# Altium PCB VehicleTracking.PcbDoc
Units mm, origin at the board's own origin, x right, y up, seen from the top; angles counter-clockwise.
Board outline 124.05 x 67.25 mm, 2 copper layers (Top Layer, Bottom Layer); 41 components, 30 nets, 221 pads, 25 vias.
Unrouted connection lines stored in the file: 3.
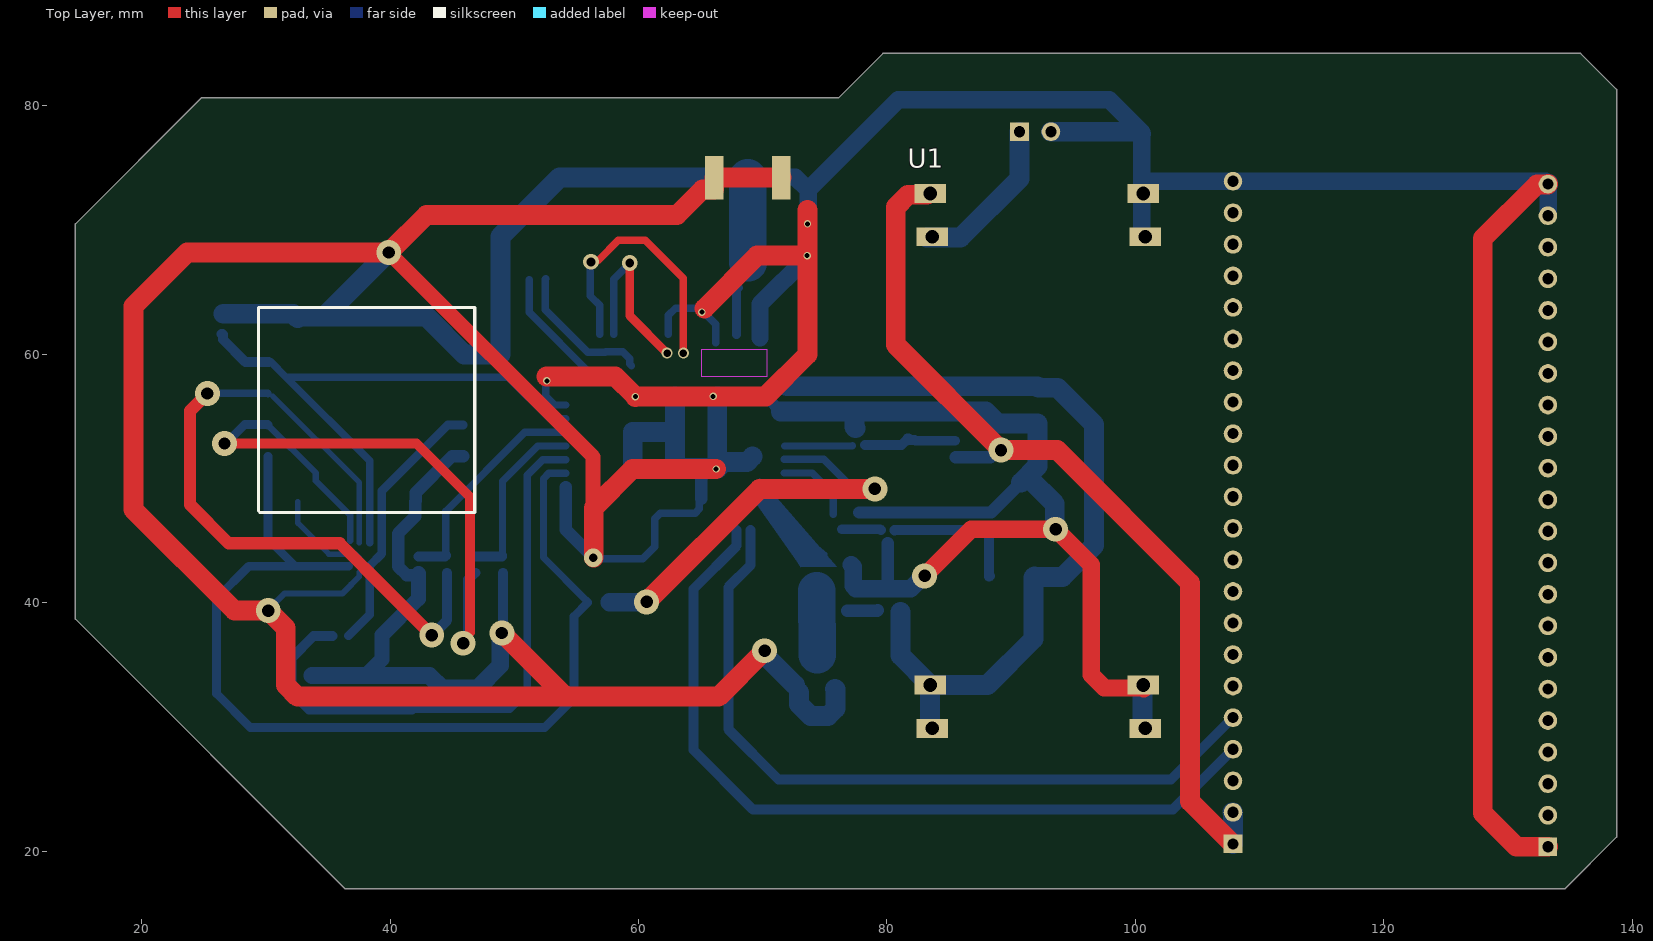
[diagram p0: Top Layer view]
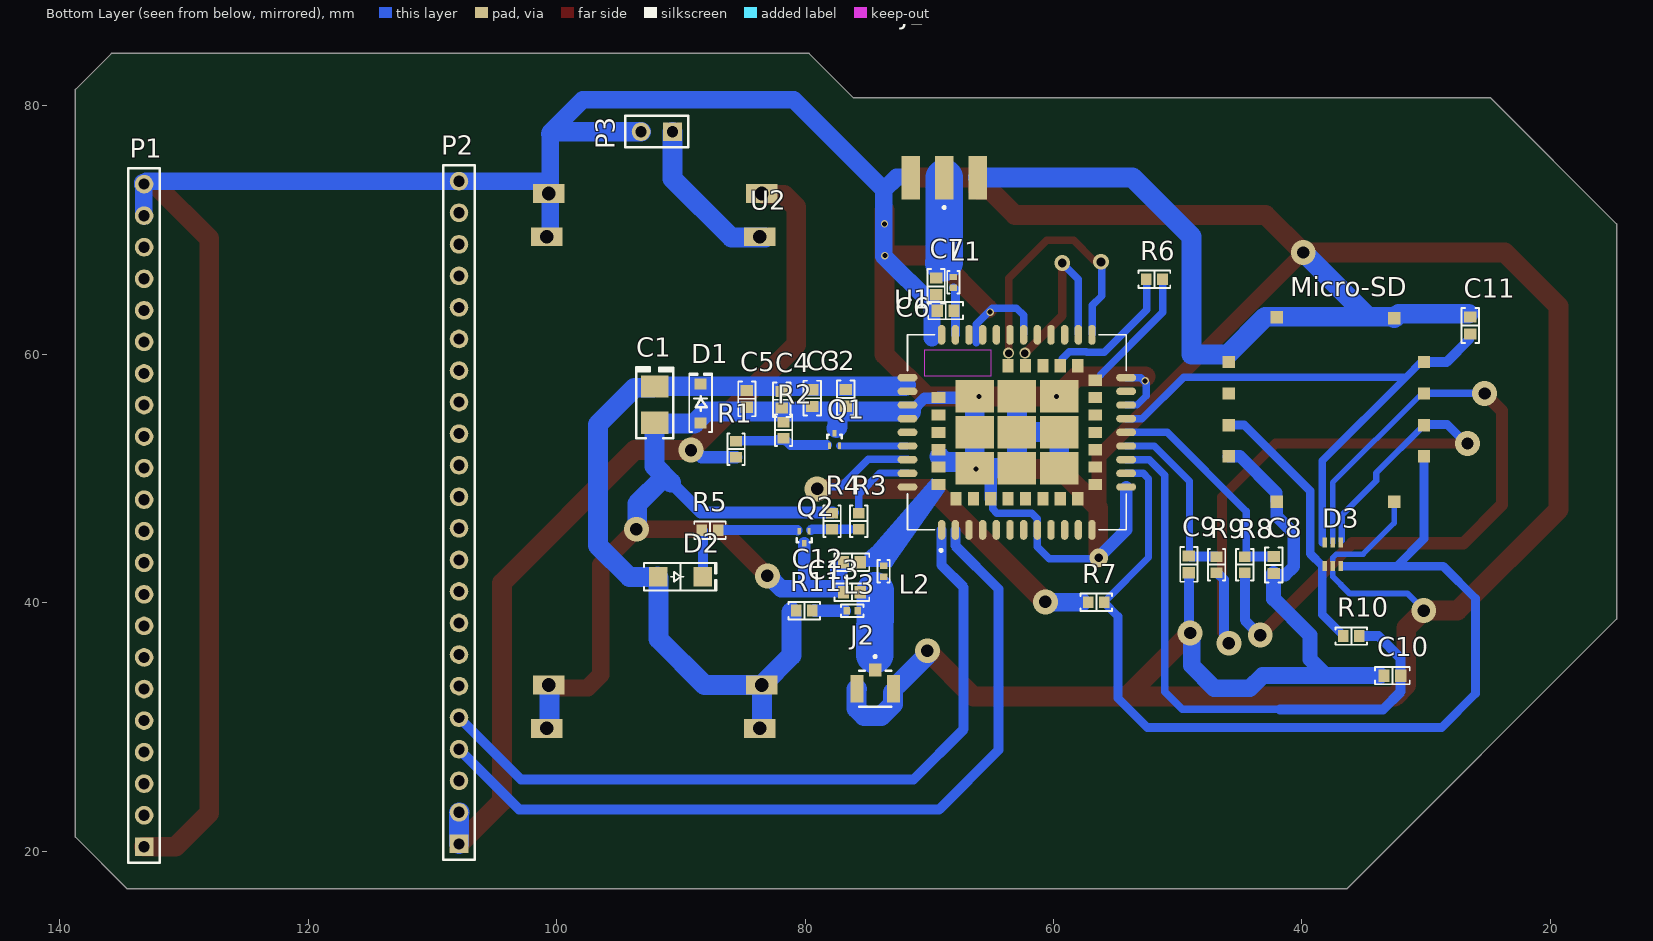
[diagram p1: Bottom Layer view, seen from below]
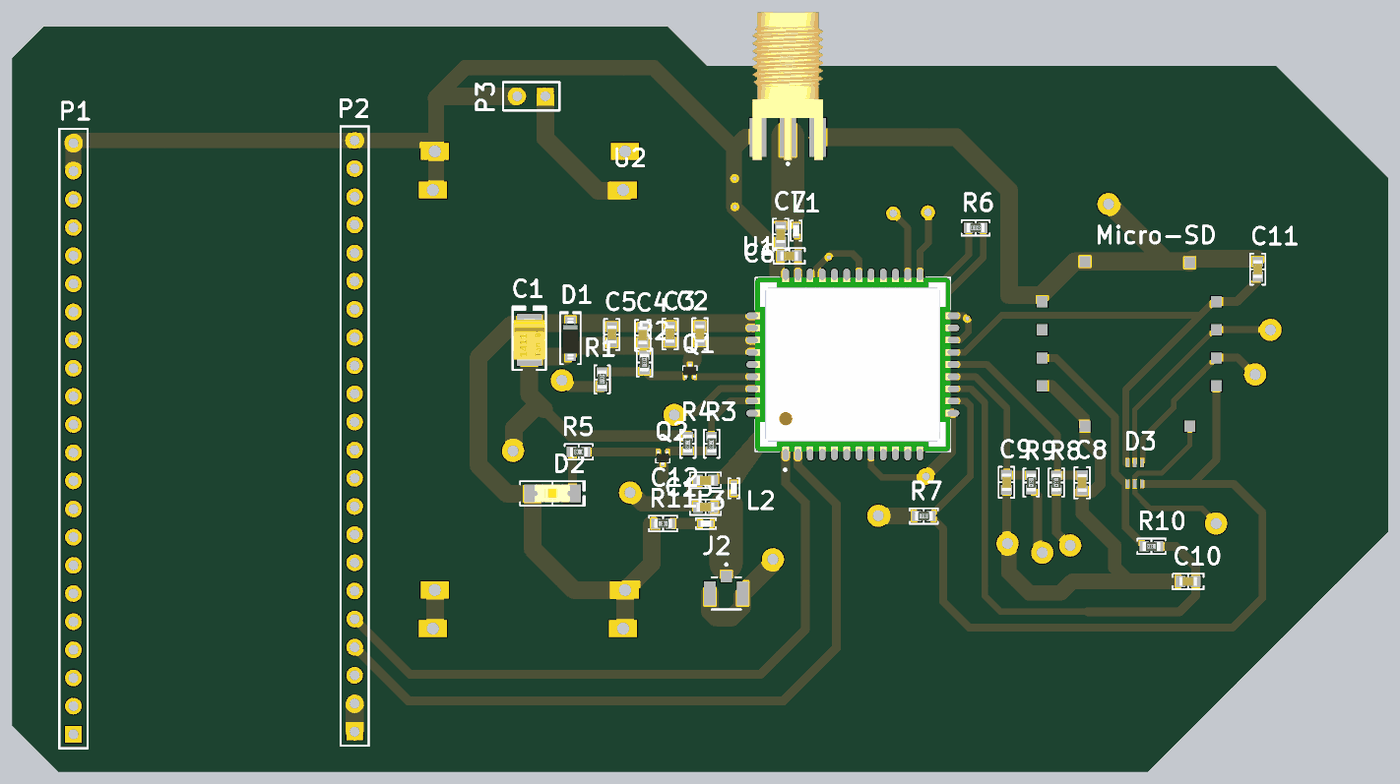
[diagram p2: 3D render of the assembled board from below, using the file's embedded part models]

## Layer stack, top to bottom
Top Solder: solder mask 0.0102, Solder Resist, Dk 3.5
Top Layer: signal copper 0.0356
Dielectric 1: dielectric 0.32, FR-4, Dk 4.8
Bottom Layer: signal copper 0.0356
Bottom Solder: solder mask 0.0102, Solder Resist, Dk 3.5

## Board outline
36.4,16.975 14.675,38.7 14.675,70.5 24.85,80.675 76.125,80.675 79.675,84.225 135.825,84.225 138.725,81.325 138.725,21.15 134.55,16.975

## Design rules (kind name [scope] priority, off if disabled: settings)
Clearance [All] p1: gap=0.254 ignorepadtopadclearanceinfootprint=FALSE except(0: Arc-Hole Track-Hole SMDPad-Hole THPad-Hole Via-Hole Fill-Hole Poly-Hole Region-Hole Text-Hole)
PolygonConnect [All] p1: connectstyle=Relief reliefconductorwidth=0.254 reliefentries=4 polygonreliefangle="90 Angle" airgapwidth=0.254
RoutingVias [All] p1: holewidth=0.711 width=2 viastyle="Through Hole" minholewidth=0.711 minwidth=0.5 maxholewidth=0.711 maxwidth=3
SolderMaskExpansion [All] p1: expansion=0.102 istentingtop=FALSE
Width [All] p1: maxlimit=3 minlimit=0.254 preferedwidth=0.6 minimp=50.000000 maximp=50.000000 favimp=50.000000
30 further rules are at their usual default settings.

## Components (designator, comment, footprint, x,y, rotation, side; value= is the part's Value field where it differs from the comment)
C1 "100µF" "CAP POL 1411_3528" 92.1,55.95 r270 bottom
C2 "100nF" "CAP 0603_1608" 76.725,56.5 r90 bottom
C3 "33pF" "CAP 0603_1608" 79.425,56.475 r90 bottom
C4 "10uF" "CAP 0603_1608" 81.875,56.35 r90 bottom
C5 "10pF" "CAP 0603_1608" 84.675,56.425 r90 bottom
C6 "C101" "CAP 0603_1608" 68.675,63.525 r180 bottom
C7 "C102" "CAP 0603_1608" 69.45,65.475 r90 bottom
C8 "22 pF" "CAP 0603_1608" 42.275,43.05 r90 bottom
C9 "22 pF" "CAP 0603_1608" 49.1,43.1 r90 bottom
C10 "22 pF" "CAP 0603_1608" 32.725,34.15 r180 bottom
C11 "100 nF" "CAP 0603_1608" 26.45,62.325 r270 bottom
C12 "C101" "CAP 0603_1608" 76.225,43.275 r180 bottom
C13 "C102" "CAP 0603_1608" 76.225,40.85 r180 bottom
D1 "MMSZ5231BT1G" SOD-123 88.4,56.05 r90 bottom
D2 "Yellow" "LED 1206_3216 YELLOW" 90.025,42.1 r180 bottom
D3 "SMF05C.TCT" SC70-6 37.525,43.9 r180 bottom
J1 "CON-SMA-EDGE-S" RFSOLUTIONS_CON-SMA-EDGE-S 68.8,74.225 r270 bottom
J2 "RSP-122811-01" SAMTEC_RSP-122811-01 74.35,33.075 r0 bottom
L1 "L101" "IND 0402_1005" 68.05,65.8 r90 bottom value="5.6 nH"
L2 "L101" "IND 0402_1005" 73.675,42.55 r270 bottom value="5.6 nH"
L3 "27 nH" "IND 0402_1005" 76.2,39.375 r180 bottom value="5.6 nH"
Micro-SD "SIM HOLDER" 115R-BCA0 30.175,48.155 r90 bottom
P1 "Header 22" HDR1X22 133.2,20.365 r90 bottom
P2 "Header 22" HDR1X22 107.85,20.6 r90 bottom
P3 "Header 2" HDR1X2 90.66,77.925 r0 bottom
Q1 "BC847BM3T5G" "ON SEMI SOT-723" 77.625,53.15 r90 bottom
Q2 "BC847BM3T5G" "ON SEMI SOT-723" 80.075,45.29 r270 bottom
R1 "4.7 kOhms" "RES 0603_1608" 85.55,52.375 r90 bottom
R2 "47 kOhms" "RES 0603_1608" 81.725,53.9 r90 bottom
R3 "4.7 kOhms" "RES 0603_1608" 75.675,46.575 r270 bottom
R4 "47 kOhms" "RES 0603_1608" 77.825,46.575 r270 bottom
R5 "1 kOhms" "RES 0603_1608" 87.65,45.85 r0 bottom
R6 "10 kOhms" "RES 0603_1608" 51.875,66.05 r180 bottom
R7 "4.7 kOhms" "RES 0603_1608" 56.55,40.05 r180 bottom
R8 "22 Ohms" "RES 0603_1608" 44.6,43.075 r270 bottom
R9 "22 Ohms" "RES 0603_1608" 46.875,43.075 r270 bottom
R10 "22 Ohms" "RES 0603_1608" 36.025,37.325 r0 bottom
R11 "10 Ohms" "RES 0603_1608" 80.05,39.375 r180 bottom
U1 "LM2596" LM2596 102.525,74.15 r180 top
U1 "SIM868" XCVR_SIM868 62.95,53.725 r90 bottom
U2 "LM2596" LM2596 102.7,28.7 r180 bottom

## Footprints (in the part's own frame and the unit in brackets; to place one, negate y for a bottom-side part, rotate by r counter-clockwise, add the part's x,y. Pads: shape width x height; smd on the part's side, far side on the other; paste and mask are expansions set on the pad)
115R-BCA0 [mm] "Micro SD"
  rect 1x1 smd: C0(0,2.4) C0(0,11.85) C0(14.75,2.4) C0(14.85,11.85) C1(11.235,0) C2(8.695,0) C3(6.155,0) C4(3.65,0) C5(11.235,15.7) C6(8.695,15.7) C7(6.155,15.7) C8(3.65,15.7)
"CAP 0603_1608" [mm] "Chip Capacitor, 2-Leads, Body 1.60x0.80mm, IPC Medium Density"
  rect 0.9x1 smd: 1(-0.675,0) 2(0.675,0)
  silkscreen extent -1.4,-0.7 1.4,0.7, body extent -0.8,-0.41 0.8,0.41, height 0.82
"CAP POL 1411_3528" [mm] "Molded Capacitor, 2-Leads, Body 3.50x2.80mm, IPC Medium Density"
  rect 1.8x2.23 smd: 1(-1.46,0) 2(1.46,0)
  silkscreen extent -3,-1.5 2.71,1.48, body extent -1.87,-1.45 1.87,1.45, height 2
HDR1X2 [mm] "Connector; Header; 2 Position"
  rect 1.5x1.5 hole 0.9: 1(0,0)
  round 1.5 hole 0.9: 2(2.54,0)
  silkscreen extent -1.27,-1.27 3.81,1.27
HDR1X22 [mm] "Connector; Header; 22 Position"
  rect 1.5x1.5 hole 0.9: 1(0,0)
  round 1.5 hole 0.9: 2(2.54,0) 3(5.08,0) 4(7.62,0) 5(10.16,0) 6(12.7,0) 7(15.24,0) 8(17.78,0) 9(20.32,0) 10(22.86,0) 11(25.4,0) 12(27.94,0) 13(30.48,0) 14(33.02,0) 15(35.56,0) 16(38.1,0) 17(40.64,0) 18(43.18,0) 19(45.72,0) 20(48.26,0) 21(50.8,0) 22(53.34,0)
  silkscreen extent -1.27,-1.27 54.61,1.27
"IND 0402_1005" [mm] "Inductor, 2-Leads, Body 1.02x0.51mm, IPC Medium Density"
  rect 0.5x0.6 smd: 1(-0.44,0) 2(0.44,0)
  silkscreen extent -0.9,-0.5 0.9,0.5, body extent -0.5,-0.3 0.5,0.3, height 0.6
"LED 1206_3216 YELLOW" [mm] "Chip Diode, 2-Leads, Body 3.13x1.55mm, IPC Medium Density"
  rect 1.5x1.6 smd: 1(-1.8,0) 2(1.8,0)
  silkscreen extent -2.92,-1.1 2.92,1.1, body extent -1.6,-0.8 1.6,0.8, height 0.9
LM2596 [mm]
  rect 2.54x1.524 hole 1.1: 0(19.05,40.767) 1(1.9,40.767) 2(19.05,1.2) 3(1.9,1.2)
"ON SEMI SOT-723" [mm] "SOT-723, 3-Leads, Body 0.8x1.20mm, Pitch 0.40mm, IPC Medium Density"
  rect 0.52x0.27 smd: 1(-0.49,0.4) 3(-0.49,-0.4)
  rect 0.52x0.36 smd: 2(0.49,0)
  silkscreen extent 0.1,-0.6 0.4,0.6, body extent -0.6,-0.6 0.6,0.6, height 0.55
"RES 0603_1608" [mm] "Chip Resistor, 2-Leads, Body 1.60x0.80mm, IPC Medium Density"
  rect 0.85x0.95 smd: 1(-0.65,0) 2(0.65,0)
  silkscreen extent -1.27,-0.7 1.27,0.7, body extent -0.8,-0.4 0.8,0.4, height 0.45
RFSOLUTIONS_CON-SMA-EDGE-S [mm]
  rect 3.5x1.5 smd: 1(0,0) G1(0,2.7) G2(0,-2.7)
  rect 3.5x1.5 smd far side: G3(0,2.7) G4(0,-2.7)
  silkscreen extent 2.3,-0.1 2.5,0.1, body extent -11.27,-3.18 2.06,3.18, height 3.55
SAMTEC_RSP-122811-01 [mm]
  rect 1x1.05 smd: 1(0,-1.525)
  rect 1.05x2.2 smd: G1(-1.475,0) G2(1.475,0)
  silkscreen extent -1.3,-2.7 1.3,1.45
SC70-6 [mm]
  rect 0.35x0.8 smd paste-1 mask+0: 1(-0.65,-0.95) 2(0,-0.95) 3(0.65,-0.95) 4(0.65,0.95) 5(0,0.95) 6(-0.65,0.95)
SOD-123 [mm] "SOD, 2-Leads, Body 1.55x3.70mm, IPC Medium Density"
  rect 0.9x0.95 smd: 1(-1.575,0) 2(1.575,0)
  silkscreen extent -2.3,-0.92 2.41,0.92, body extent -1.86,-0.78 1.86,0.77, height 1.35
XCVR_SIM868 [mm]
  oval 1.6x0.6 smd: 1(-7.85,6.05) 2(-7.85,4.95) 3(-7.85,3.85) 4(-7.85,2.75) 5(-7.85,1.65) 6(-7.85,0.55) 7(-7.85,-0.55) 8(-7.85,-1.65) 9(-7.85,-2.75) 10(-7.85,-3.85) 11(-7.85,-4.95) 12(-7.85,-6.05) 22(7.85,-6.05) 23(7.85,-4.95) 24(7.85,-3.85) 25(7.85,-2.75) 26(7.85,-1.65) 27(7.85,-0.55) 28(7.85,0.55) 29(7.85,1.65) 30(7.85,2.75) 31(7.85,3.85) 32(7.85,4.95) 33(7.85,6.05)
  oval 0.6x1.6 smd: 13(-4.4,-8.8) 14(-3.3,-8.8) 15(-2.2,-8.8) 16(-1.1,-8.8) 17(0,-8.8) 18(1.1,-8.8) 19(2.2,-8.8) 20(3.3,-8.8) 21(4.4,-8.8) 34(4.4,8.8) 35(3.3,8.8) 36(2.2,8.8) 37(1.1,8.8) 38(0,8.8) 39(-1.1,8.8) 40(-2.2,8.8) 41(-3.3,8.8) 42(-4.4,8.8)
  rect 1.1x0.9 smd paste-2: 43(-5.35,4.9) 44(-5.35,3.5) 45(-5.35,2.1) 46(-5.35,0.7) 47(-5.35,-0.7) 48(-5.35,-2.1) 49(-5.35,-3.5) 50(-5.35,-4.9) 58(5.35,-4.9) 59(5.35,-3.5) 60(5.35,-2.1) 61(5.35,-0.7) 62(5.35,0.7)
  rect 0.9x1.1 smd paste-2: 51(-4.2,-6.3) 52(-2.8,-6.3) 53(-1.4,-6.3) 54(0,-6.3) 55(1.4,-6.3) 56(2.8,-6.3) 57(4.2,-6.3) 63(2.8,6.3) 64(1.4,6.3) 65(0,6.3) 66(-1.4,6.3) 67(-2.8,6.3) 68(-4.2,6.3)
  rect 2.6x3.1 smd paste-3: 69(-2.9,3.4) 70(-2.9,0) 71(-2.9,-3.4) 72(0,-3.4) 73(2.9,-3.4) 74(2.9,0) 75(2.9,3.4) 76(0,3.4) 77(0,0)
  Keep-Out Layer region: 6.65,2.102 4.504,2.102 4.504,7.4 6.65,7.4
  Keep-Out Layer region: 6.65,2.101 4.502,2.101 4.502,7.4 6.65,7.4
  silkscreen extent -9.6,-8.8 7.85,8.8, body extent -7.85,-8.8 7.85,8.8, height 2.6

## Part data
C1: library part F930J107MBA, "CAP TANT 100UF 20% 6.3V 1411", Device Package="1411 (3528 Metric)", ESR (Equivalent Series Resistance)="900mOhm @ 100kHz", Lifetime @ Temp.="2000 Hrs @ 125°C", Manufacturer="AVX Corporation", Manufacturer Size Code=B, Operating Temperature="-55°C ~ 125°C", Supplier Part Number 1=478-8156-1-ND, Tolerance=±20%, Voltage - Rated=6.3V, Capacitance=100µF, ComponentLink1Description=Datasheet, ComponentLink1URL=http://datasheets.avx.com/F93.pdf, ComponentLink2Description="DigiKey Link", ComponentLink2URL=http://digikey.com/product-detail/en/avx-corporation/F930J107MBA/478-8156-1-ND/4005661, Features="General Purpose", Height - Seated (Max)="0.091\" (2.30mm)", lastupdated="2.09.2020 01:15:45", Lifecycle Status=Active, Minimum Order=1, Mounting Type="Surface Mount", Package / Case="1411 (3528 Metric)", packaging=TapeAndReel, Part Number=F930J107MBA, Part Status=Active, partid=257, price=0.14, series=F93, Size / Dimension="0.138\" L x 0.110\" W (3.50mm x 2.80mm)", Supplier 1=DigiKey, Type=Molded
C2 C3 C4 C5: library part 600S2R7AW250XT, "CAP CER 2.7PF 250V NP0 0603", Capacitance="2.7 pF", Device Package="0603 (1608 Metric)", Manufacturer="American Technical Ceramics", Operating Temperature="-55°C ~ 125°C", Supplier Part Number 1=478-12310-1-ND, Temperature Coefficient="C0G, NP0", Tolerance=±0.05pF, Voltage - Rated=250V, Applications="RF, Microwave, High Frequency, Bypass, Decoupling", ComponentLink1Description=Datasheet, ComponentLink1URL=http://www.atceramics.com/UserFiles/600s.pdf, ComponentLink2Description="DigiKey Link", ComponentLink2URL=https://www.digikey.com/en/products/detail/american-technical-ceramics/600S2R7AW250XT/3909029, Features="High Q, Low Loss, Ultra Low ESR", lastupdated="5.11.2023 20:09:27", Lifecycle Status=Active, Minimum Order=1, Mounting Type="Surface Mount, MLCC", Package / Case="0603 (1608 Metric)", packaging=TapeAndReel, Part Number=600S2R7AW250XT, Part Status=Active, partid=2143, price=0.41, series="ATC 600S", Size / Dimension="0.063\" L x 0.032\" W (1.60mm x 0.81mm)", Supplier 1=DigiKey, Thickness (Max)="0.035\" (0.89mm)"
C6 C7 C8 C9 C10 C11 C12 C13: library part C0603C272F3GAC7867, "CAP CER 2700PF 25V NP0 0603", Capacitance="2700 pF", Device Package="0603 (1608 Metric)", Manufacturer=KEMET, Operating Temperature="-55°C ~ 125°C", Supplier Part Number 1=399-17403-1-ND, Temperature Coefficient="C0G, NP0", Tolerance=±1%, Voltage - Rated=25V, Applications="General Purpose", ComponentLink1Description=Datasheet, ComponentLink1URL=https://api.kemet.com/component-edge/download/datasheet/C0603C272F3GACTU.pdf, ComponentLink2Description="DigiKey Link", ComponentLink2URL=https://www.digikey.com/en/products/detail/kemet/C0603C272F3GAC7867/2200413, Features="Low ESL", lastupdated="5.11.2023 20:09:28", Lifecycle Status=Active, Minimum Order=1, Mounting Type="Surface Mount, MLCC", Package / Case="0603 (1608 Metric)", packaging=TapeAndReel, Part Number=C0603C272F3GAC7867, Part Status=Active, partid=2138, price=0.40, series="SMD Comm C0G", Size / Dimension="0.063\" L x 0.031\" W (1.60mm x 0.80mm)", Supplier 1=DigiKey, Thickness (Max)="0.034\" (0.87mm)"
D1: "DIODE ZENER 5.1V 500MW SOD123", Current - Reverse Leakage @ Vr="5µA @ 2V", Manufacturer="ON Semiconductor", Operating Temperature="-55°C ~ 150°C", Package / Case=SOD-123, Power - Max=500mW, Supplier Part Number 1=MMSZ5231BT1GOSCT-ND, Tolerance=±5%, Voltage - Forward (Vf) (Max) @ If="900mV @ 10mA", Voltage - Zener (Nom) (Vz)=5.1V, ComponentLink1Description=Datasheet, ComponentLink1URL=http://www.onsemi.com/pub/Collateral/MMSZ5221BT1-D.PDF, ComponentLink2Description="DigiKey Link", ComponentLink2URL=http://digikey.com/product-detail/en/on-semiconductor/MMSZ5231BT1G/MMSZ5231BT1GOSCT-ND/964561, lastupdated="5.11.2023 21:26:31", Lifecycle Status=Active, Minimum Order=1, Mounting Type="Surface Mount", packaging=TapeAndReel, Part Number=MMSZ5231BT1G, Part Status=Active, partid=2389, price=0.03, series="Automotive, AEC-Q101", Supplier 1=DigiKey, Supplier Device Package=SOD-123, Impedance (Max) (Zzt)="17 Ohms"
D2: library part 5990240007F, "LED YELLOW 1206 SMD", Current - Test=20mA, Device Package="1206 (3216 Metric)", Lens Color=0.80mm, Manufacturer=Dialight, Millicandela Rating=126mcd, Supplier Device Package=1206, Supplier Part Number 1=350-4363-1-ND, Voltage - Forward (Vf) (Typ)=2.1V, Color=Yellow, ComponentLink1Description=Datasheet, ComponentLink1URL=http://www.dialightsignalsandcomponents.com/Assets/Brochures_And_Catalogs/Indication/CBI_SMD_new/Dialight_CBI_data_599-1206_Apr2018.pdf, ComponentLink2Description="DigiKey Link", ComponentLink2URL=https://www.digikey.com/en/products/detail/dialight/5990240007F/9385418, Configuration=Standard, Height (Max)=0.80mm, lastupdated="5.11.2023 21:32:29", Lens Size="2.00mm x 1.60mm", Lens Style="Rectangle with Flat Top", Lifecycle Status=Active, Minimum Order=1, Mounting Type="Surface Mount", Package / Case="1206 (3216 Metric)", packaging=TapeAndReel, Part Number=5990240007F, Part Status=Active, partid=1, price=0.04, series=599, Size / Dimension="3.20mm L x 1.60mm W", Supplier 1=DigiKey, Viewing Angle=140°, Wavelength - Dominant=590nm
D3: "12.5V Clamp 8A (8/20Âµs) Ipp Tvs Diode Surface Mount SC-70-6", Package="SC-70-6 Semtech", Availability="In Stock", Check_prices=https://www.snapeda.com/parts/SMF05C.TCT/Semtech+Corporation/view-part/?ref=eda, MF=Semtech, MP=SMF05C.TCT, price=None, Purchase-URL=https://pricing.snapeda.com/search/part/SMF05C.TCT/?ref=eda, SnapEDA_Link=https://www.snapeda.com/parts/SMF05C.TCT/Semtech+Corporation/view-part/?ref=snap
J1: "SMA Connector Jack, Female Socket - Board Edge, End Launch Solder", Package=None, Check_prices=https://www.snapeda.com/parts/CON-SMA-EDGE-S/RF+Solutions/view-part/?ref=eda, Digi-Key_Part_Number=CON-SMA-EDGE-S-ND, MF="RF Solutions", MP=CON-SMA-EDGE-S, Purchase-URL=https://pricing.snapeda.com/search/part/CON-SMA-EDGE-S/?ref=eda, SnapEDA_Link=https://www.snapeda.com/parts/CON-SMA-EDGE-S/RF+Solutions/view-part/?ref=snap
J2: "U.FL (UMCC), IPEX MHF1 Connector Receptacle, Male Pin 50Ohm Surface Mount Solder", Package=None, Availability=Unavailable, MP=RSP-122811-01, price=None
L1 L2 L3: library part WCI1005CP5N6GDG, "CHIP IND 1005,5.6NH,G,20Q,0.76A,", Current Rating (Amps)="760 mA", DC Resistance (DCR)="83mOhm Max", Device Package="0402 (1005 Metric)", Frequency - Self Resonant=4.8GHz, Manufacturer="INPAQ Technology Co., Ltd", Operating Temperature="-25°C ~ 125°C", Q @ Freq="48 @ 900MHz", Supplier Device Package=0402, Supplier Part Number 1=3526-WCI1005CP5N6GDGCT-ND, Tolerance=±2%, Inductance="5.6 nH", Inductance Frequency - Test="250 MHz", ComponentLink1Description=Datasheet, ComponentLink1URL="https://mm.digikey.com/Volume0/opasdata/d220001/medias/docus/5561/WCI1005CP Series.pdf", ComponentLink2Description="DigiKey Link", ComponentLink2URL=https://www.digikey.com/en/products/detail/inpaq-technology-co-ltd/WCI1005CP5N6GDG/20486592, Height - Seated (Max)="0.026\" (0.66mm)", lastupdated="5.11.2023 21:41:35", Lifecycle Status=Active, Material - Core=Ceramic, Minimum Order=1, Mounting Type="Surface Mount", Package / Case="0402 (1005 Metric)", packaging=TapeAndReel, Part Number=WCI1005CP5N6GDG, partid=6805, price=0.05, series=WCI1005CP, Shielding=Unshielded, Size / Dimension="0.047\" L x 0.025\" W (1.19mm x 0.64mm)", Supplier 1=DigiKey, Type=Wirewound
Micro-SD: library part 115R-BCA0
P1 P2: "Header, 22-Pin", LatestRevisionDate=17-Jul-2002, LatestRevisionNote="Re-released for DXP Platform.", Publisher="Altium Limited"
P3: "Header, 2-Pin", LatestRevisionDate=17-Jul-2002, LatestRevisionNote="Re-released for DXP Platform.", Publisher="Altium Limited"
Q1 Q2: "TRANS NPN 45V 0.1A SOT-723", Current - Collector (Ic) (Max)=100mA, Current - Collector Cutoff (Max)="15nA (ICBO)", DC Current Gain (hFE) (Min) @ Ic, Vce="200 @ 2mA, 5V", Frequency - Transition=100MHz, Manufacturer="ON Semiconductor", Operating Temperature="-55°C ~ 150°C (TJ)", Package / Case=SOT-723, Power - Max=260mW, Supplier Part Number 1=BC847BM3T5GOSCT-ND, Voltage - Collector Emitter Breakdown (Max)=45V, ComponentLink1Description=Datasheet, ComponentLink1URL=http://www.onsemi.com/pub/Collateral/BC847BM3-D.PDF, ComponentLink2Description="DigiKey Link", ComponentLink2URL=http://digikey.com/product-detail/en/on-semiconductor/BC847BM3T5G/BC847BM3T5GOSCT-ND/3487296, lastupdated="5.11.2023 21:52:22", Lifecycle Status=Active, Minimum Order=1, Mounting Type="Surface Mount", packaging=TapeAndReel, Part Number=BC847BM3T5G, Part Status=Active, partid=18, price=0.04, series=-, Supplier 1=DigiKey, Supplier Device Package=SOT-723, Transistor Type=NPN, Vce Saturation (Max) @ Ib, Ic="600mV @ 5mA, 100mA"
R1 R2 R3 R4 R5 R7 R8 R9 R10 R11: library part RNCS0603BKE10K0, "RES 10K OHM 0.1% 1/16W 0603", Device Package="0603 (1608 Metric)", Manufacturer="Stackpole Electronics Inc", Operating Temperature="-55°C ~ 155°C", Power (Watts)="0.063W, 1/16W", Ratings=AEC-Q200, Resistance="10 kOhms", Supplier Device Package=0603, Supplier Part Number 1=RNCS0603BKE10K0CT-ND, Temperature Coefficient=±25ppm/°C, Tolerance=±0.1%, ComponentLink1Description=Datasheet, ComponentLink1URL=https://www.seielect.com/catalog/sei-rncs_rnch.pdf, ComponentLink2Description="DigiKey Link", ComponentLink2URL=https://www.digikey.com/en/products/detail/stackpole-electronics-inc/RNCS0603BKE10K0/1708836, Composition="Thin Film", Features="Anti-Corrosive, Automotive AEC-Q200, Moisture Resistant", Height - Seated (Max)="0.022\" (0.55mm)", lastupdated="5.11.2023 20:39:24", Lifecycle Status=Active, Minimum Order=1, Number of Terminations=2, Package / Case="0603 (1608 Metric)", packaging=TapeAndReel, Part Number=RNCS0603BKE10K0, Part Status=Active, partid=4838, price=0.06, series=RNCS, Size / Dimension="0.061\" L x 0.031\" W (1.55mm x 0.80mm)", Supplier 1=DigiKey
R6: library part RNCS0603BKE100R, "RES 100 OHM 0.1% 1/16W 0603", Device Package="0603 (1608 Metric)", Manufacturer="Stackpole Electronics Inc", Operating Temperature="-55°C ~ 155°C", Power (Watts)="0.063W, 1/16W", Ratings=AEC-Q200, Resistance="100 Ohms", Supplier Device Package=0603, Supplier Part Number 1=RNCS0603BKE100RCT-ND, Temperature Coefficient=±25ppm/°C, Tolerance=±0.1%, ComponentLink1Description=Datasheet, ComponentLink1URL=https://www.seielect.com/catalog/sei-rncs_rnch.pdf, ComponentLink2Description="DigiKey Link", ComponentLink2URL=https://www.digikey.com/en/products/detail/stackpole-electronics-inc/RNCS0603BKE100R/1799988, Composition="Thin Film", Features="Anti-Corrosive, Automotive AEC-Q200, Moisture Resistant", Height - Seated (Max)="0.022\" (0.55mm)", lastupdated="5.11.2023 20:39:24", Lifecycle Status=Active, Minimum Order=1, Number of Terminations=2, Package / Case="0603 (1608 Metric)", packaging=TapeAndReel, Part Number=RNCS0603BKE100R, Part Status=Active, partid=4839, price=0.06, series=RNCS, Size / Dimension="0.061\" L x 0.031\" W (1.55mm x 0.80mm)", Supplier 1=DigiKey
U1: "SIM868 GNSS, GSM RF mikroBUSâ„¢ Clickâ„¢ Platform Evaluation Expansion Board", Package=None, Availability="Not in stock", Check_prices=https://www.snapeda.com/parts/SIM868/MikroElektronika/view-part/?ref=eda, MF=MikroElektronika, MP=SIM868, price=None, SnapEDA_Link=https://www.snapeda.com/parts/SIM868/MikroElektronika/view-part/?ref=snap

## Via types
v1: diameter 2, hole 1, Top Layer to Bottom Layer, 13 vias
v2: diameter 0.6, hole 0.4, Top Layer to Bottom Layer, 7 vias
v3: diameter 1.27, hole 0.711, Top Layer to Bottom Layer, 2 vias
v4: diameter 0.9, hole 0.6, Top Layer to Bottom Layer, 2 vias
v5: diameter 1.5, hole 0.7, Top Layer to Bottom Layer, 1 vias

## Nets (pads, with @x,y where several pads share a name; then routed paths per layer and width w, separated by ;. In a path a pad name is that pad's centre, name@x,y a point inside that pad or via, vN(x,y) a via of type N, cw(c..) or ccw(c..) an arc to the next point about the centre after c; other vN are vias at no path point)
3.3V: P2.1 P2.2 R1.1 U1.2@83.475,72.95 | length 74.4
  Top Layer w1.6: U1.2@83.225,72.85 81.7,72.85 80.7,71.85 80.7,60.775 v1(89.175,52.3) 93.7,52.3 104.4,41.6 104.4,24.025 P2.1@107.75,20.675
  Bottom Layer w1: R1.1 88.329,51.725 88.904,52.3 v1(89.175,52.3)
  Bottom Layer w1.6: P2.2@107.825,23.15 107.85,23.125 P2.1
4.1V: C1.1 C2.2 C3.2 C4.2 C5.2 D1.2 D2.1 R11.1 U1.0 U1.34 U1.35 U2.2 | length 66.8
  Bottom Layer w1.6: 71.875,57.525 71.965,57.435 C1.1@92.05,57.435 ; R11.1@81.075,39.275 81.075,35.775 83.475,33.375 U1.0@83.5,33.375 ; U2.2@83.475,30.075 83.475,33.35 U1.0@83.5,33.375 ; D2.1@91.85,42.075 94.125,42.075 96.675,44.625 96.675,54.35 93.715,57.31 92.2,57.31 C1.1 ; D2.1@91.875,42.125 91.8,42.05 91.8,37.1 88.075,33.375 U1.0@83.5,33.375
GND: C1.2 C2.1 C3.1 C4.1 C5.1 C6.1 C7.1 C8.1 C9.1 C10.1 C11.1 C12.1 C13.1 D1.1 D3.2 J1.G1 J1.G2 J1.G3 J1.G4 J2.G1 J2.G2 Micro-SD.C0 Micro-SD.C5 Micro-SD.C8 P1.1 P1.21 P1.22 P2.22 P3.2 Q1.2 Q2.2 R2.2 R4.1 U1.1@100.625,33.383 U1.3@100.625,72.95 U1.8 U1.13 U1.19 U1.21 U1.27 U1.30 U1.31 U1.33 U1.36 U1.37 U1.45 U1.63 U1.66 U1.67 U1.69 U1.70 U1.71 U1.72 U1.73 U1.74 U1.75 U1.76 U1.77 U2.1 U2.3 | length 675.4
  Top Layer w1.2: v1@39.975,68.225 39.975,68.125 56.35,51.75 v5(56.35,43.625)
  Top Layer w1.4: v1(83.025,42.175) 86.775,45.925 v1(93.575,45.925) 96.425,43.075 96.425,34.2 97.475,33.15 100.625,33.15 U1.1@100.675,33.1
  Top Layer w1.6: v1(39.9,68.2) 23.675,68.2 19.35,63.875 19.35,47.5 27.475,39.375 v1(30.2,39.375) 31.6,37.975 31.6,33.387 32.537,32.45 66.45,32.45 70.019,36.019 v1@70.131,36.019 ; v1@39.975,68.275 42.925,71.225 63.1,71.225 65.15,73.275 66.05,73.275 66.1,73.325 J1.G3 J1.G4 ; v1(49,37.575) 53.875,32.7 53.875,32.575 ; 52.6,58.225 58.125,58.225 v2(59.75,56.6) ; v5@56.4,43.65 56.4,47.65 59.525,50.775 v2(66.25,50.775) ; v2@59.75,56.55 59.825,56.625 v2(66,56.625) 70.237,56.625 73.6,59.988 v2(73.6,70.5) 73.6,71.625 ; 65.3,63.7 69.55,67.95 v2(73.575,67.95) ; P1.1 130.66,20.365 127.95,23.075 127.95,69.325 132.311,73.686 133.181,73.686 P1.22
  Bottom Layer w0.45: Micro-SD.C0@32.575,48.155 32.575,46.425 35.075,43.925 37.225,43.925 37.525,43.625 37.525,43.425 ; 36.879,41.475 37.521,42.117 37.521,42.344 37.529,42.352 37.529,42.463
  Bottom Layer w0.5: v1@30.162,39.412 31.5,40.75 36.154,40.75 36.879,41.475
  Bottom Layer w0.6: 52.525,56.675 52.525,57.675 52.975,58.125 U1.21 ; 52.55,56.65 53.275,55.925 U1.19 ; v5@56.375,43.625 56.45,43.55 60.35,43.55 61.3,44.5 U1.8 61.3,46.774 61.755,47.229 64.55,47.229 64.9,47.579 64.9,48.175 U1.45@65.075,48.35 ; U1.27@62.385,61.601 62.385,63.135 62.975,63.725 64.925,63.725 66.225,62.425 66.225,60.955
  Bottom Layer w0.8: v1@48.95,37.6 49.1,37.75 C9.1
  Bottom Layer w0.9: U1.63@69.25,56.475 70.375,56.475 71.45,55.4
  Bottom Layer w1: Micro-SD.C0@42.025,48.155 42.025,46.95 40.65,45.575 40.65,42.925 41.35,42.225 C8.1@42.275,42.225 ; Micro-SD.C0@42.075,48.2 42.075,48.875 45.005,51.805 Micro-SD.C8 ; U1.13 54.15,45.875 v5@56.3,43.725 ; U1.45 65.05,50.025 U1.69@65.1,50.075 ; U1.75@66.575,56.525 U1.63 ; R4.1@77.775,47.275 88.375,47.275 90.796,49.696 ; 79.85,41.275 80.075,41.5 Q2.2
  Bottom Layer w1.2: 38.1,34.175 38.1,34.2 39.35,35.45 39.35,37.4 42.275,40.325 42.275,42.225 C8.1
  Bottom Layer w1.4: C10.1@33.725,34.15 43.175,34.15 44.2,33.125 47.05,33.125 48.885,34.96 48.885,37.298 49.037,37.45 v1@49.125,37.45 ; 69.775,61.355 69.775,64.025 73.65,67.9 73.65,73.25 ; J1.G2 71.55,74.275 72.625,74.275 73.65,73.25 ; C12.1@77.112,43.063 77.275,42.9 77.275,41.375 77.5,41.15 81.905,41.15 82.93,42.175 v1(83.025,42.175) ; U2.1@100.5,69.525 100.5,73.875 ; P1.21 133.219,71.184 133.219,73.719 P1.22@133.225,73.725 ; P1.22@133.3,73.65 P1.22@133.225,73.725 ; P1.22@133.3,73.8 P1.22@133.225,73.725 ; 73.65,73.25 80.9,80.5 97.875,80.5 100.5,77.875 100.5,73.875 ; 100.5,73.875 100.565,73.94 P2.22 133.01,73.94 P1.22@133.225,73.725
  Bottom Layer w1.6: C11.1@26.6,63.275 32.205,63.275 Micro-SD.C0@32.455,63.025 ; Micro-SD.C0@32.575,62.905 Micro-SD.C0@32.455,63.025 ; v1@39.775,68.125 34.675,63.025 ; U1.71@59.535,50.851 59.535,53.751 U1.77@62.935,53.751 ; U1.74@62.935,56.625 U1.77@62.935,53.751 ; J1.G1 53.625,74.225 48.875,69.475 48.875,60 45.975,60 42.95,63.025 34.675,63.025 ; U1.75@66.335,56.625 66.335,50.851 62.935,50.851 U1.77@62.935,53.751 ; U1.69 66.85,51.325 68.725,51.325 69.175,51.775 ; v1(70.15,36.15) 70.227,36.073 70.227,35.748 J2.G1@72.6,33.375 ; 71.45,55.4 77.375,55.4 ; J2.G1@72.925,32.775 72.925,31.837 73.862,30.9 75.25,30.9 75.85,31.5 75.85,33.05 J2.G2 ; 77.475,54.05 77.375,54.15 77.375,55.4 ; 90.796,49.696 92.1,51 92.1,54.45 88.9,54.45 87.95,55.4 77.375,55.4 ; 91.375,50.225 91.375,50.1 93.498,47.977 93.498,46.002 v1(93.575,45.925) ; P3.2 100.275,77.925 100.45,77.75 ; Micro-SD.C0@32.455,63.025 34.675,63.025
  other v2: 52.625,57.875 65.1,63.4
GNSS_EN: R6.1 U1.59 | length 11.6
  Bottom Layer w0.6: R6.1@52.525,66.075 52.492,66.042 52.492,63.608 55.925,60.175 57.326,60.175 57.356,60.205 58.745,60.205 59.285,59.665 59.285,59.251 U1.59@59.435,59.101
GPIO1: R6.2 U1.57 | length 10.4
  Bottom Layer w0.254: U1.57@56.212,58.374 56.212,58.274 56.535,57.951 U1.57@56.635,57.951
  Bottom Layer w0.6: R6.2@51.225,66.025 51.192,65.992 51.192,63.394 U1.57@56.212,58.374
GPS_ANT: C12.2 L2.1 U1.68
GPS_RXD: U1.22 U1.62 | length 21.6
  Top Layer w0.6: v3(56.175,67.45) 56.303,67.578 56.778,67.578 58.377,69.177 60.548,69.177 63.6,66.125 63.6,60.123 v4(63.617,60.106)
  Bottom Layer w0.6: v3(56.175,67.45) 56.125,67.4 56.125,64.7 56.885,63.94 U1.22@56.885,61.601
GPS_TXD: U1.23 U1.61 | length 14.8
  Top Layer w0.7: v3(59.3,67.35) 59.3,63.1 v4(62.299,60.101)
  Bottom Layer w0.6: U1.23@58,61.601 58,66.055 59.295,67.35 v3(59.3,67.35)
GSM_ANT: C6.2 L1.1 U1.32 | length 3.8
  Bottom Layer w0.7: U1.32@67.885,61.601 67.885,65.195 L1.1
NetC7_2: C7.2 J1.1 L1.2 | length 6.9
  Bottom Layer w3: J1.1 68.8,67.425 68.85,67.375
NetC13_2: C13.2 J2.1 L2.2 L3.2 | length 5.2
  Bottom Layer w3: 74.35,40.975 74.375,35.8
NetD2_2: D2.2 R5.2 | length 3.9
  Bottom Layer w0.8: R5.2@88.25,45.85 88.225,45.825 D2.2 D2.2@88.275,42.15 ; R5.2@88.275,45.825 R5.2
NetD3_1: D3.1 Micro-SD.C7 R10.2 | length 21.5
  Bottom Layer w0.7: R10.2@36.65,37.35 38.358,39.058 38.358,42.806 38.35,42.814 38.35,42.975 39.325,43.95 39.325,49 44.635,54.31 Micro-SD.C7
NetD3_4: D3.4 Micro-SD.C3 R9.2 | length 55.2
  Top Layer w0.8: v1(26.675,52.825) 42.125,52.825 46.425,48.525 46.425,37.625 45.874,37.074 v1(45.875,36.75)
  Bottom Layer w0.5: Micro-SD.C3 34.025,50.46 34.025,49.825 34.1,49.75 36.801,47.049 D3.4@36.801,45
  Bottom Layer w0.7: v1@26.775,52.825 28.3,54.35 30.135,54.35 Micro-SD.C3
  Bottom Layer w0.8: v1@46.275,37.175 46.275,41.875 46.825,42.425 R9.2
NetD3_5: D3.5 Micro-SD.C2 R8.2 | length 58.5
  Top Layer w1: v1(25.3,56.85) 23.9,55.45 23.9,47.9 27,44.8 35.95,44.8 39.804,40.946 43.3,37.45 v1@43.375,37.45
  Bottom Layer w0.44: Micro-SD.C2@30.55,56.65 37.525,49.675 D3.5
  Bottom Layer w0.6: v1@25.325,56.875 30.15,56.875 Micro-SD.C2
  Bottom Layer w0.8: v1@43.3,37.3 44.6,38.6 R8.2
  other v1: 43.35,37.4
NetL3_1: L3.1 R11.2 | length 2.5
  Bottom Layer w1: L3.1@76.8,39.375 79.225,39.375 R11.2@79.25,39.4
NETLIGHT: R3.1 U1.41 | length 6.2
  Bottom Layer w0.6: U1.41@71.735,50.451 73.974,50.451 75.675,48.75 R3.1 R3.1@75.675,47.15
NetQ1_1: Q1.1 R1.2 R2.1 | length 7.4
  Bottom Layer w0.8: 78.225,52.7 81.175,52.7 81.65,53.175 81.65,53.225 81.675,53.25 R2.1 ; R2.1@81.9,53.125 82.234,53.125 82.309,53.05 R1.2@85.475,53.05
NetQ2_1: Q2.1 R3.2 R4.2 | length 3.1
  Bottom Layer w0.8: 76.367,45.925 R4.2@77.8,45.925 ; R4.2 79.45,45.925 79.5,45.875
NetQ2_3: Q2.3 R5.1 | length 6.4
  Bottom Layer w0.8: Q2.3@80.591,45.841 80.6,45.85 R5.1
PWRKEY: Q1.3 U1.39 | length 5.5
  Bottom Layer w0.6: U1.39 77.2,52.625 Q1.3@77.225,52.65
SIM1_CLK: C9.2 R9.1 U1.16 | length 14.3
  Bottom Layer w0.6: C9.2@49.05,43.95 49.05,49.775 51.9,52.625 U1.16
  Bottom Layer w0.8: R9.1 49,43.725 C9.2@49,43.825
SIM1_DATA: C10.2 R10.1 U1.15 | length 48
  Bottom Layer w0.6: 41.75,31.425 49.625,31.425 51.05,32.85 51.05,50.275 52.3,51.525 U1.15
  Bottom Layer w0.8: R10.1 33.85,37.325 32.05,35.525 C10.2 32.05,32.85 33.475,31.425 41.75,31.425
SIM1_DET: D3.3 Micro-SD.C4 R7.2 U1.14 | length 81.4
  Bottom Layer w0.6: U1.14 52.775,50.425 52.35,50 52.35,43.65 55.775,40.225 55.775,40.15 R7.2@55.8,40.125
  Bottom Layer w0.7: Micro-SD.C4 30.175,45.15 32.35,42.975 ; 36.65,42.95 28.625,42.95 26.025,40.35 26.025,32.7 28.75,29.975 52.45,29.975 54.8,32.325 54.8,38.9 55.9,40 R7.2
SIM1_RST: C8.2 R8.1 U1.17 | length 18
  Bottom Layer w0.6: R8.1@44.5,43.975 44.5,47.375 50.85,53.725 U1.17
  Bottom Layer w0.8: C8.2 44.425,43.725 R8.1@44.525,43.825
SIM1_VDD: C11.2 D3.6 Micro-SD.C1 U1.18 | length 46.7
  Bottom Layer w0.6: Micro-SD.C1@30.4,59.4 31.625,58.175 ; D3.6@38.35,44.85 38.35,51.45 31.625,58.175 ; U1.18 52.875,54.825 49.525,58.175 31.625,58.175
  Bottom Layer w0.8: C11.2 26.5,61.65 26.55,61.6 26.55,61.2 28.35,59.4 Micro-SD.C1@30.2,59.4
UART1_RXD: P2.4 U1.2@67.9,45.875 | length 66.6
  Bottom Layer w0.8: U1.2@67.9,45.875 67.9,44.6 64.425,41.125 64.425,28.15 69.2,23.375 103.005,23.375 P2.4
UART1_TXD: P2.5 U1.1@69,45.875 | length 61.2
  Bottom Layer w0.8: U1.1@69,45.875 69,43.025 67.225,41.25 67.225,29.825 71.275,25.775 102.865,25.775 P2.5
VCC: P3.1 U2.0 | length 13.2
  Bottom Layer w1.6: U2.0@83.2,69.4 85.925,69.4 90.66,74.135 P3.1
VDD_EXT: R7.1 U1.40 | length 33.3
  Top Layer w1.6: v1@60.725,40.175 60.75,40.175 69.75,49.175 v1(79.025,49.175)
  Bottom Layer w0.6: U1.40@71.735,51.551 74.924,51.551 77.125,49.35 78.85,49.35 v1(79.025,49.175)
  Bottom Layer w1.5: 57.675,40.05 60.675,40.05 v1@60.7,40.075
  other v1: 60.65,40.075
pads on no net: Micro-SD.C6 P1.2 P1.3 P1.4 P1.5 P1.6 P1.7 P1.8 P1.9 P1.10 P1.11 P1.12 P1.13 P1.14 P1.15 P1.16 P1.17 P1.18 P1.19 P1.20 P2.3 P2.6 P2.7 P2.8 P2.9 P2.10 P2.11 P2.12 P2.13 P2.14 P2.15 P2.16 P2.17 P2.18 P2.19 P2.20 P2.21 U1.3@66.8,45.875 U1.4 U1.5 U1.6 U1.7 U1.9 U1.10 U1.11 U1.12 U1.20 U1.24 U1.25 U1.26 U1.28 U1.29 U1.38 U1.42 U1.43 U1.44 U1.46 U1.47 U1.48 U1.49 U1.50 U1.51 U1.52 U1.53 U1.54 U1.55 U1.56 U1.58 U1.60 U1.64 U1.65
copper on no net: | length 3
  Bottom Layer w1.6: 100.525,30.025 100.575,30.075 100.575,33.05

## Other copper
Bottom Layer:
  region net GPS_ANT: 73.05,42.875 73.05,45.1 68.975,49.175
  region net GPS_ANT: 68.975,49.15 73,45.125 73,42.925 75.175,42.925 75.2,42.95 75.2,43.975
  region net GPS_ANT: 68.75,49.025 69.75,50.025 75.95,42.925 73.075,42.925

## Silkscreen, mask and mechanical layers (free items; w line width, h text height)
Mechanical 1:
  lines w0.254: 24.825,80.675 76.125,80.675 79.675,84.225 135.825,84.225 138.725,81.325 138.725,21.15 134.55,16.975 36.4,16.975 14.675,38.7 14.675,70.5 24.85,80.675